# Altium PCB Pmaster-A9112-remote-1.PcbDoc
Units mil, origin at the board's own origin, x right, y up, seen from the top; angles counter-clockwise.
Board outline 1091.15 x 2078.81 mil, 2 copper layers (TopLayer, BottomLayer); 56 components, 56 nets, 182 pads, 223 vias.
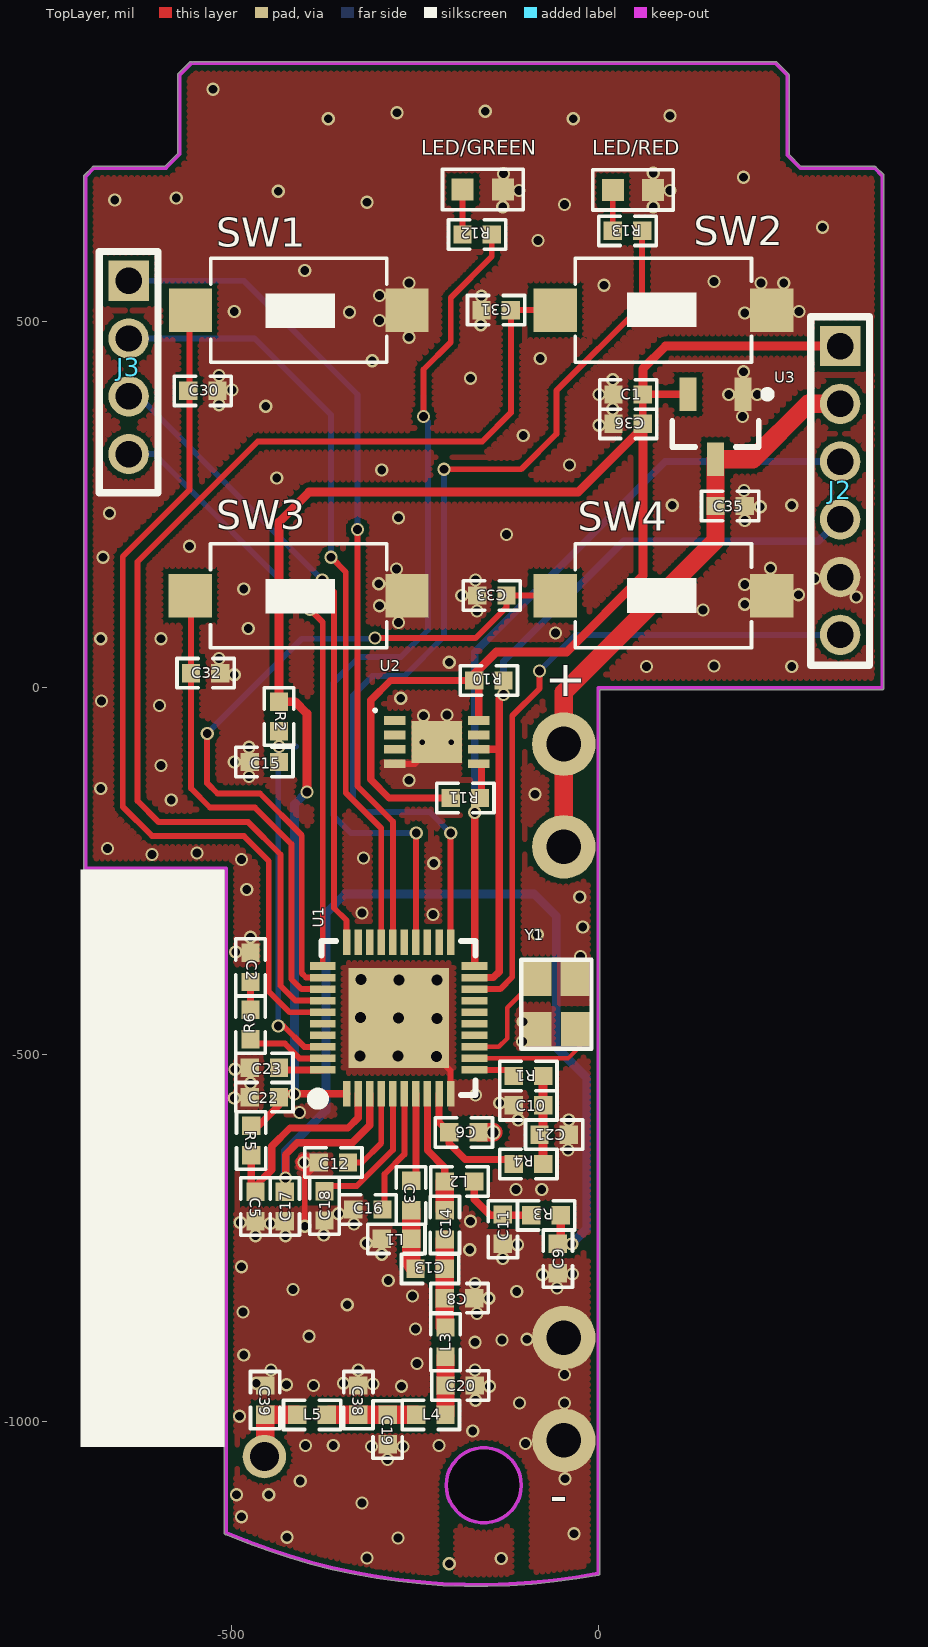
[diagram p0: TopLayer view]
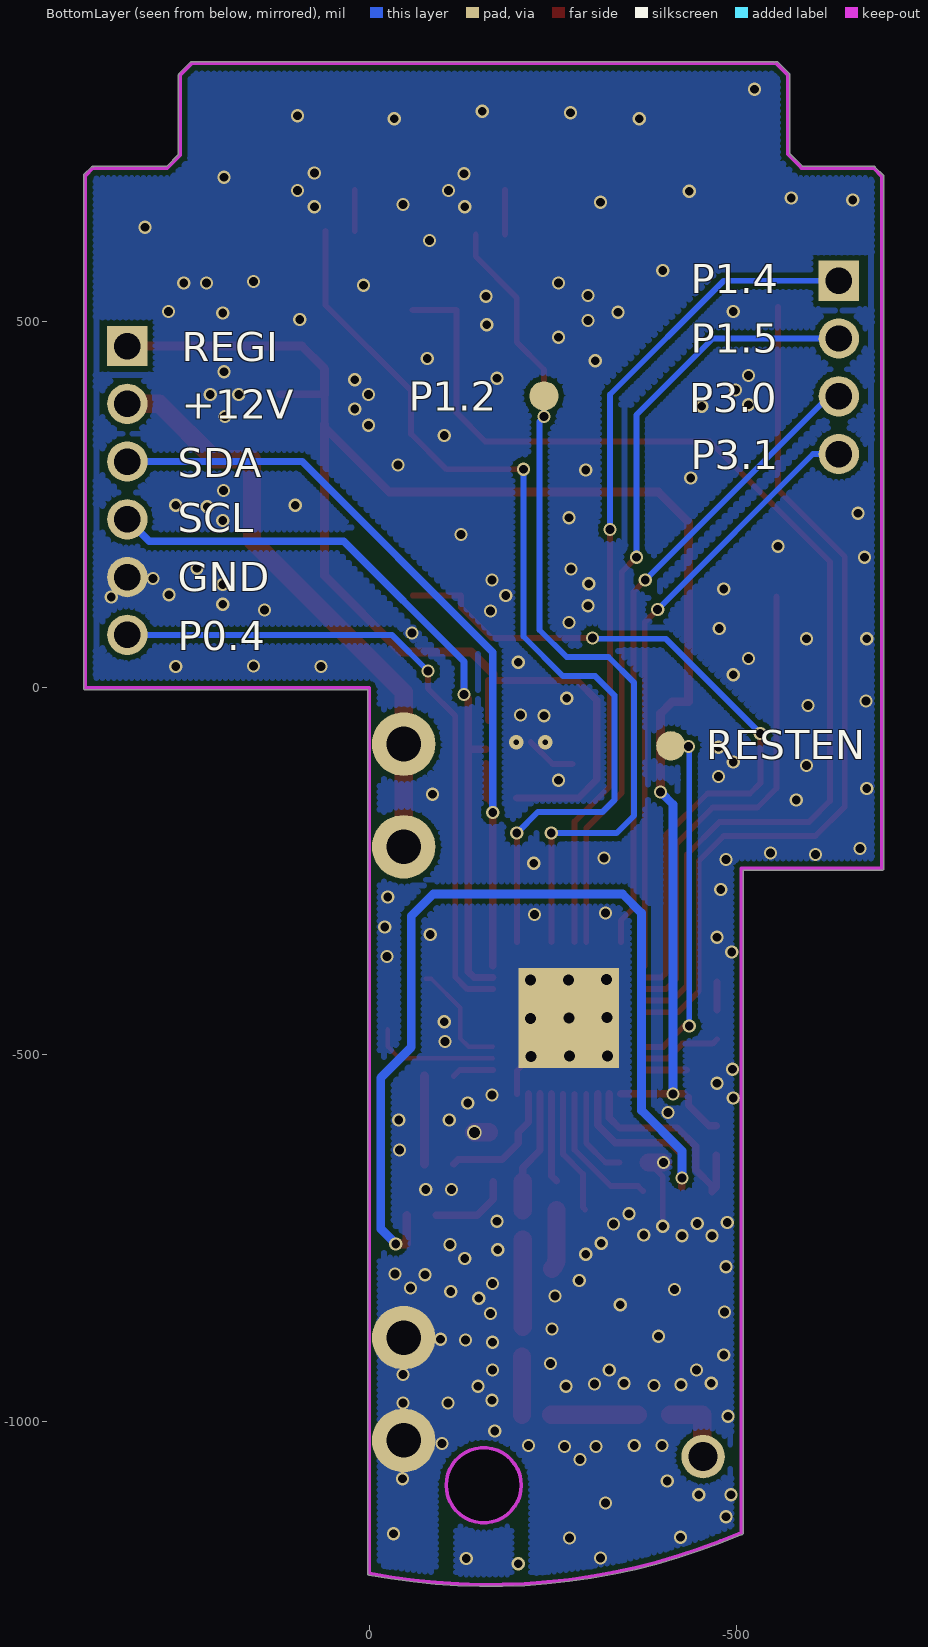
[diagram p1: BottomLayer view, seen from below]

## Layer stack, top to bottom
TopSolder: solder mask 0.4, Solder Resist, Dk 3.5
TopLayer: signal copper 1.4
Dielectric1: dielectric 12.6, FR-4, Dk 4.8
BottomLayer: signal copper 1.4
BottomSolder: solder mask 0.4, Solder Resist, Dk 3.5

## Board outline
-699,-248.51 cw(c-699,-246) -701.41,-245.29 -701.41,697.2 cw(c-698.9,697.2) -700.68,698.98 -689.46,710.2 cw(c-687.68,708.43) -687.68,710.94 -590.68,710.94 cw(c-588.62,709.49) -590.4,711.27 -573.11,728.56 -573.11,835.59 cw(c-570.59,835.59) -572.37,837.37 -556.62,853.12 cw(c-554.84,851.34) -552.6,852.47 cw(c-550.35,851.34) -550.35,853.85 241.97,853.85 cw(c241.97,851.34) 243.75,853.12 259.49,837.37 cw(c257.72,835.59) 260.23,835.59 260.23,727.52 cw(c257.72,727.52) 260.23,727.42 276.71,710.94 374.72,710.94 cw(c374.72,708.43) 375.87,710.67 cw(c377.01,708.43) 378.79,710.2 388.9,700.09 cw(c387.13,698.31) 389.64,698.31 389.64,0 cw(c387.13,0) 387.13,-2.51 2.51,-2.51 2.51,-1207.01 cw(c0,-1207.01) 0.45,-1209.48 cw(c-163.29,-356.2) -506.39,-1154.44 cw(c-507,-1152) -509.52,-1152 -509.52,-248.51
cut-out: -155.89,-1138.15 cw(c-155.89,-1086.97) -207.07,-1086.97 cw(c-155.89,-1086.97) -155.89,-1035.79 cw(c-155.89,-1086.97) -104.7,-1086.97 cw(c-155.89,-1086.97)

## Design rules (kind name [scope] priority, off if disabled: settings)
Clearance Clearance_1 [InNet('NetC19_1') vs (IsWire) Or (IsPad) Or (IsVia) Or (IsFill) Or (InPoly)] p1: gap=12
Clearance [All] p2: gap=7
ComponentClearance [All] p1 off: gap=10 collisioncheckmode=3 verticalgap=10 showdistances=FALSE
FabricationTestPointUsage TestPointUsage [All] p1: valid=0 allowmultiple=FALSE
FabricationTestpoint Testpoint [All] p1: side=3 testpointundercomponent=TRUE minsize=40 maxsize=100 preferedsize=60 minholesize=20 maxholesize=40 preferedholesize=32 testpointgrid=1 allowsidetop=TRUE allowsidebottom=TRUE usegrid=TRUE gridtolerance=0.01
PolygonConnect [All] p1: connectstyle=Direct reliefconductorwidth=10 reliefentries=4 polygonreliefangle="90 Angle" airgapwidth=10
RoutingPriority [All] p1: routingpriority=4
RoutingVias [All] p1: holewidth=16 width=26 viastyle="Through Hole" minholewidth=12 minwidth=18 maxholewidth=28 maxwidth=50
SolderMaskExpansion SolderMaskExpansion_1 [HasPad('*A')] p1: expansion=-30
SolderMaskExpansion [All] p2 off: expansion=0
SolderMaskExpansion SolderMaskExpansion_2 [All] p3 off: expansion=-30
Width [All] p1: maxlimit=100 minlimit=6 preferedwidth=8
26 further rules are at their usual default settings.

## Components (designator, comment, footprint, x,y, rotation, side; value= is the part's Value field where it differs from the comment)
C1 "10uF" A0402 61,400 r180 top
C2 "2.2uF" A0402 -474,-361 r270 top
C3 "100pF" A0402 -255,-672 r270 top
C5 "2.2uF" A0402 -467,-687 r270 top
C6 "1uF" A0402 -203,-606 r0 top
C8 "8.2pF" A0402 -169,-832 r180 top
C9 "2.2uF" A0402 -55,-758 r270 top
C10 "1nF" A0402 -115,-569 r0 top
C11 "NC" A0402 -130,-758 r90 top
C12 "1nF" A0402 -341,-647 r180 top
C13 "2.7pF" A0402 -249,-792 r0 top
C14 "27pF" A0402 -209,-712 r270 top
C15 "22nF" A0402 -435,-101 r180 top
C16 "0.1uF" A0402 -334,-711 r0 top
C17 "2.2uF" A0402 -427,-687 r270 top
C18 "470pF" A0402 -373,-726 r90 top
C19 "8.2pF" A0402 -287,-991 r270 top
C20 "15pF" A0402 -208,-951 r0 top
C21 "1uF" A0402 -40,-609 r180 top
C22 "2.2uF" A0402 -475,-558 r0 top
C23 "2.2uF" A0402 -475,-518 r0 top
C30 "0.1uF" A0402 -519,405 r180 top
C31 "0.1uF" A0402 -159,515 r0 top
C32 "0.1uF" A0402 -515,20 r180 top
C33 "0.1uF" A0402 -165,126 r0 top
C35 "2.2uF" A0402 200,248 r180 top
C36 "2.2uF" A0402 61,360 r180 top
C38 "NC" A0402 -327,-951 r270 top (schematic designator C19)
C39 "NC" A0402 -454,-951 r270 top (schematic designator C19)
J2 "Comment" HDR6_2.0#1 285,506 r270 top
J3 "Comment" HDR6_2.0#2 -685,595 r270 top
L1 "39nH" A0402 -255,-751 r180 top
L2 "33nH" A0402 -169,-673 r180 top
L3 "22nH" A0402 -208,-912 r90 top
L4 "22nH" A0402 -248,-991 r0 top
L5 "0" A0402 -410,-991 r0 top (schematic designator L4)
LED/GREEN "" 0603 -184.71,679.3 r0 top locked
LED/RED "" 0603 20,679 r0 top
R1 "0" A0402 -115,-529 r0 top
R2 "100K" A0402 -435,-19 r270 top
R3 "0" A0402 -51,-719 r180 top
R4 "0" A0402 -75,-649 r180 top
R5 "0" A0402 -473,-597 r270 top
R6 "50" A0402 -474,-479 r90 top
R10 "4.7k" A0402 -169,10 r0 top
R11 "4.7k" A0402 -161,-150 r180 top
R12 "330" A0402 -145,618 r180 top
R13 "330" A0402 60,623 r180 top
SW1 "SW-PB" SW-SMD -555.83,514.8 r90 top locked
SW2 "SW-PB" SW-SMD 236.73,514.8 r270 top locked
SW3 "SW-PB" SW-SMD -555.92,125.47 r90 top locked
SW4 "SW-PB" SW-SMD 236.73,125.47 r270 top locked
U1 "A9112F4" QFN40_5*5 -272,-450 r90 top
U2 "Comment" DFN-MC8 -220,-74 r0 top
U3 "LP3995-33B3F" SOT-23_N 160,356 r270 top
Y1 "Comment" XTAL_3.2*2.5 -57,-431 r0 top

## Footprints (in the part's own frame and the unit in brackets; to place one, negate y for a bottom-side part, rotate by r counter-clockwise, add the part's x,y. Pads: shape width x height; smd on the part's side, far side on the other; paste and mask are expansions set on the pad)
0603 [mil]
  rect 30x30 smd: 1(0,0) 2(55,0)
  silkscreen extent -28,-28 83,28
A0402 [mil]
  rect 25x25 smd: 1(0,0) 2(40,0)
  silkscreen extent -19,-20 59,20, body extent -5,-15 45,15, height 39
DFN-MC8 [mm] "SON, 8-Leads, Body 2x3mm, Pitch 0.5mm, Microchip Recommended"
  rect 1.75x1.45 smd: 0(0,0)
  rect 0.75x0.3 smd: 1(-1.45,0.75) 2(-1.45,0.25) 3(-1.45,-0.25) 4(-1.45,-0.75) 5(1.45,-0.75) 6(1.45,-0.25) 7(1.45,0.25) 8(1.45,0.75)
  silkscreen extent -2.18,1.05 -2.08,1.15, body extent -1.55,-1.05 1.55,1.05, height 1
HDR6_2.0#1 [mil]
  rect 55x55 hole 36: 1(40,45)
  round 55 hole 36: 2(118.74,45) 3(197.48,45) 4(276.22,45) 5(354.96,45) 6(433.7,45)
  silkscreen extent 0,5 475,85
HDR6_2.0#2 [mil]
  rect 55x55 hole 36: 1(40,45)
  round 55 hole 36: 2(118.74,45) 3(197.48,45) 4(276.22,45)
  silkscreen extent 0,5 329,85
QFN40_5*5 [mil]
  rect 35x10.24 smd: 1(-103.43,70.87) 2(-103.43,55.12) 3(-103.43,39.37) 4(-103.43,23.62) 5(-103.43,7.87) 6(-103.43,-7.87) 7(-103.43,-23.62) 8(-103.43,-39.37) 9(-103.43,-55.12) 10(-103.43,-70.87) 21(103.42,-70.87) 22(103.42,-55.12) 23(103.42,-39.37) 24(103.42,-23.62) 25(103.42,-7.87) 26(103.42,7.87) 27(103.42,23.62) 28(103.42,39.37) 29(103.42,55.12) 30(103.42,70.87)
  rect 10.24x35 smd: 11(-70.87,-103.42) 12(-55.12,-103.43) 13(-39.37,-103.43) 14(-23.62,-103.42) 15(-7.87,-103.42) 16(7.87,-103.42) 17(23.62,-103.43) 18(39.37,-103.42) 19(55.12,-103.43) 20(70.87,-103.42) 31(70.87,103.42) 32(55.12,103.43) 33(39.37,103.43) 34(23.62,103.42) 35(7.87,103.43) 36(-7.87,103.42) 37(-23.62,103.42) 38(-39.37,103.43) 39(-55.12,103.42) 40(-70.87,103.42)
  round 15 hole 15: ""(-52.5,-51.5) ""(-52,0.5) ""(-51.5,52.5) ""(-0.5,-52) ""(0.5,52) ""(51.5,-52.5) ""(52,-0.5) ""(52.5,51.5)
  rect 136.79x136.79 hole 15: ""(0,0)
  silkscreen extent -115,-105 105,115
SOT-23_N [mm] "SOT23, 3-Leads, Body 2.9x1.3mm, Pitch 0.95mm, Lead Span 2.5mm, IPC Medium Density"
  rect 1.15x0.6 smd: 1(-1.125,0.95) 2(-1.125,-0.95) 3(1.125,0)
  silkscreen extent -1.25,-1.5 0.7,1.92, body extent -0.7,-1.5 0.7,1.5, height 1.1
SW-SMD [mm]
  rect 1.5x1.5 smd: 1(0,0) 2(0,-7.5)
  silkscreen extent -1.8,-6.8 1.8,-0.7
XTAL_3.2*2.5 [mm]
  rect 1x1.2 smd: 1(-0.66,0.87) 2(-0.66,-0.87) 3(0.66,-0.87) 4(0.65,0.87)
  silkscreen extent -1.21,-1.55 1.22,1.53

## Part data
C1 C2 C3 C5 C6 C8 C10 C12 C13 C14 C16 C18 C21 C22 C23 C30 C31 C32 C33 C35 LED/GREEN LED/RED: library part CAP
C9 C11 C17 C19 C20 C36 C38 C39: library part C/0603, "Chip C"
C15: library part C/1206, "Chip C"
L1 L2: library part L/0402, "Chip L"
L3 L4 L5 R6: library part L/0603
R1 R5 R10 R11 R12 R13: library part RES1
R2: library part R/0402, "Chip R"
R3 R4: library part R/0603, "Chip  R"
U3: library part REG\G903\3.3V\SOT-223, "GMT 3.3V REGULTOR"

## Free pads (board coordinates)
  round 59.06 hole 39.37: 0(-455,-1048)
  round 40 smd far side: 1(-411,-79) 2(-238,398)
  round 86.61 hole 47.24: 1(-46.73,-216.57) 1(-46.73,-76.57) 2(-46.73,-1025.87) 2(-46.73,-885.87)

## Via types
v1: diameter 18, hole 12, TopLayer to BottomLayer, tented both sides, 220 vias
v2: diameter 19.68, hole 7.87, TopLayer to BottomLayer, tented top, 2 vias
v3: diameter 20, hole 15, TopLayer to BottomLayer, tented both sides, 1 vias

## Nets (pads, with @x,y where several pads share a name; then routed paths per layer and width w, separated by ;. In a path a pad name is that pad's centre, name@x,y a point inside that pad or via, vN(x,y) a via of type N, cw(c..) or ccw(c..) an arc to the next point about the centre after c; other vN are vias at no path point)
1: C39.2 L5.1 pad.0 | length 102
  TopLayer w25: pad.0 -454,-1048 C39.2 L5.1
+12V: C35.2 J2.2 pad.1@-46.73,-76.57 pad.1@-46.73,-216.57 U3.3 | length 815.2
  TopLayer w25: pad.1@-46.73,-216.57 -46.73,-76.57 -46.73,-5.73 160,201 U3.3 210.71,311.71 286.26,387.26 J2.2
BG: C12.1 U1.4 | length 123.5
  TopLayer w8: C12.1 -322,-647 -295.62,-620.62 U1.4
GND: C1.2 C2.1 C5.2 C6.2 C8.1 C9.2 C10.1 C11.1 C12.2 C15.2 C16.1 C17.2 C18.1 C19.2 C20.2 C21.1 C22.1 C23.1 C30.1 C31.1 C32.1 C33.1 C35.1 C36.2 C38.1 C39.1 J2.5 L1.2 LED/GREEN.2 LED/RED.2 pad.2@-46.73,-885.87 pad.2@-46.73,-1025.87 SW1.2 SW2.1 SW3.2 SW4.1 U1. U1.10 U2.0 U2.4 U3.1 Y1.2 Y1.4 | length 262.1
  TopLayer w8: v1(-400,-734) -400,-666 C12.2 ; U2.4 -249.53,-103.53 U2.0 ; U1.@-220.5,-502.5 -201.13,-521.87 U1.10
  TopLayer w25: v1@-400,-647 C12.2 ; C6.2 v3(-143,-606)
  other v1: -203,-1194 -132,-1187 -315,-1186 -273,-1159 -424,-1158 -33,-1153 -486,-1130 -322,-1111 -493,-1100 -449,-1100 -406,-1081 -45,-1078 -287,-1052 -309,-1034 -266,-1034 -399,-1033 -361,-1033 -217,-1033 -99,-1030 -171,-1013 -489,-993 -107,-975 -46,-975 -167,-971 -268,-952 -148,-952 -388,-951 -425,-950 -307,-949 -466,-948 -347,-948 -46,-936 -446,-930 -327,-930 -168,-930 -247,-921 -483,-909.57 -168,-892 -131,-889 -97,-888 -394,-884 -249,-874 -165,-853 -484,-851 -342,-841 -149,-832 -253,-829 -111,-823 -416,-820 -56,-818 -168,-812 -286,-808 -76,-800 -35,-799 -486,-789 -130,-778 -295,-772 -175,-766 -110,-759 -316,-757 -467,-747 -426,-747 -374,-746 -333,-731 -447,-730 -488,-729 -174,-727 -354,-717 -112,-684 -77,-684 -401,-647 -41,-630 -109,-589 -40,-589 -407,-579 -134,-566 -496,-559 -167,-555 -474,-539 -495,-520 -103,-482 -102,-455 -24,-366 -494,-360 -474,-340 -83,-336 -21,-326 -225,-309 -322,-307 -25,-285 -479,-275 -224,-239 -486,-234 -320,-232 -608,-227 -547,-225 -669,-219 -582,-153 -86,-145 -678,-137 -258,-126 -476,-121 -596,-106 -496,-101 -476,-81 -238,-38 -206,-37 -598,-24 -677,-18 -269,-14 -496,18 66,29 264,29 158,30 -203,35 -517,40 -678,67 -596,67 -58,75 -477,81 -272,89 -165,105 143,106 -298,112 200,114 352,124 -186,126 273,127 -483,135 200,141 -299,142 -167,147 295,149 -275,162 235,163 -675,178 -557,193 -125,209 200,228 -272,232 -666,238 221,247 101,249 264,249 199,269 -438,286 -295,297 -39,304 -102,344 1,358 197,370 20,380 -453,384 -517,386 1,400 178,400 217,400 -499,406 20,420 -174,422 -517,426 198,431 -308,446 -79,449 -258,478 -160,495 -298,501 95,502 200,511 -339,512 -496,513 274,513 -159,534 -298,535 8,549 -258,552 222,552 253,552 158,554 -400,569 -82,610 306,628 -130,656 75,656 -46,659 -315,662 -659,665 -575,668 -436,677 -108,678 98,678 198,696 -129,701 75,702 -368,776 -34,776 98,780 -274,784 -154,786 -525,816
  other v2: -239.68,-74 -200.32,-74
NetC2_2: C2.2 R6.2 | length 38
  TopLayer w10: R6.2 C2.2
NetC3_2: C3.2 C13.1 L1.1 | length 81.6
  TopLayer w25: C3.2 L1.1 -255,-777.52 ccw(c-234.52,-777.52) C13.1
NetC8_2: C8.2 C13.2 C14.2 L3.2 | length 119
  TopLayer w25: L3.2@-209,-871 C8.2 C14.2
NetC11_2: C11.2 L2.1 R3.2 | length 111.1
  TopLayer w10: L2.1 -169,-697 -147,-719 R3.2
NetC19_1: C19.1 C38.2 L4.1 L5.2 | length 118
  TopLayer w25: L5.2@-366,-991 C19.1 L4.1
NetC20_1: C20.1 L3.1 L4.2 | length 79
  TopLayer w25: L4.2 C20.1 L3.1
NetC23_2: C23.2 U1.40 | length 56.7
  TopLayer w10: C23.2@-432.13,-520.87 U1.40
NetLED_1_1: LED/GREEN.1 R12.2 | length 61
  TopLayer w8: R12.2 LED/GREEN.1@-185,679.01
NetLED_1_3: LED/RED.1 R13.2 | length 56
  TopLayer w8: R13.2 LED/RED.1
P0.0: U1.14
P0.1: U1.15
P0.2: U1.16
P0.3: U1.17
P0.4/DEBUG_EN: J2.6 U1.18 | length 921.2
  TopLayer w8: U1.18 -133.63,-410.63 -117,-394 -117,-38 -80,-1 v1(-80,23)
  BottomLayer w8: v1(-80,23) -30.7,72.3 J2.6
P0.5: 
P0.6: 
P0.7/GIO1: R13.1 U1.21 | length 1326.7
  TopLayer w8: v1(-210,298) -105,298 -57,346 -57,405 60,522 R13.1 ; U1.21 v1@-201.13,-198
  BottomLayer w8: v1(-210,298) -210,70 -264,16 -308,16 -334,-10 -334,-153 -318,-169 -230,-169 v1(-201,-198)
P1.0: U1.22
P1.1: U1.23
P1.2/GIO2: pad.2@-238,398 R12.1 U1.24 | length 1218.3
  TopLayer w8: U1.24 v1@-248.38,-198 ; v1(-238,370) -238,434 -201,471 -201,532 -145,588 R12.1
  BottomLayer w8: v1(-248,-198) -337,-198 -361,-174 -361,7 -326,42 -269,42 -232,79 -232,363 v1@-238,369 ; v1(-238,370) pad.2@-238,398
P1.3/CKO: U1.25
P1.4/TTDIO: J3.1 U1.26 | length 1142.7
  TopLayer w8: v1(-328,216) -328,-134 -279.87,-182.13 U1.26
  BottomLayer w8: J3.1 -483,555 -328,400 v1(-328,216)
P1.5/TTCLK: J3.2 U1.27 | length 1066.1
  TopLayer w8: v1(-364,178) -344,158 -344,-143 -295.62,-191.38 U1.27
  BottomLayer w8: J3.2 -468.26,476.26 -364,372 v1(-364,178)
P1.6: U1.28
P1.7: U1.29
P3.0: J3.3 U1.30 | length 875.1
  TopLayer w8: v1(-376,147) -360,131 -360,-300 -342.87,-317.13 U1.30
  BottomLayer w8: J3.3 -626.52,397.52 v1(-376,147)
P3.1: J3.4 U1.31 | length 828.1
  TopLayer w8: v1(-393,107) -375.42,89.42 U1.31
  BottomLayer w8: J3.4 -604.78,318.78 v1(-393,107)
P3.2: C33.2 SW4.2 U1.32 | length 1006.2
  TopLayer w8: v1(-533,-62) -533,-130 -519,-144 -461,-144 -404,-201 -404,-389 -398.12,-394.88 U1.32 ; v1(-304,68) -167,68 -125,110 C33.2 SW4.2@-59.07,126
  BottomLayer w8: v1(-533,-62) -404,67 v1@-304,67
P3.3: C32.2 SW3.1 U1.33 | length 662.3
  TopLayer w8: SW3.1@-555,124.55 C32.2 -555,-137 -529,-163 -468,-163 -418,-213 -418,-397 -404.37,-410.63 U1.33
P3.4: C31.2 SW2.2 U1.34 | length 1589.6
  TopLayer w8: U1.34 -412.62,-426.38 -433,-406 -433,-227 -477,-183 -599,-183 -628,-154 -628,172 -464,336 -158,336 -119,375 C31.2 SW2.2@-58.74,515
P3.5: C30.2 SW1.1 U1.35 | length 1211.6
  TopLayer w8: SW1.1@-557,519 -557,270 -648,179 -648,-162 -608,-202 -483,-202 -449,-236 -449,-414 -420.87,-442.13 U1.35
P3.6: 
P3.7: 
REGI: C1.1 C22.2 C36.1 J2.1 R2.1 R5.1 R10.1 R11.2 U1.1 U2.8 U3.2 | length 2865.3
  TopLayer w10: R5.1 -463,-597 -435,-569 C22.2 ; C22.2@-429.42,-553.43 v1(-414,-553.43) U1.1 ; R11.2 -285,-150 -310,-125 -310,-17 -283,10 R10.1 ; U2.8 R10.1@-162.91,10 ; C36.1 C1.1 ; C1.1@61.29,400.29 U3.2
  TopLayer w12: v1(-397,-142) -397,-35 -413,-19 R2.1 -435,226 -394,267 -27,267 C36.1@61,355 ; R10.1 -169,19 -139,49 -43,49 61,153 C36.1@61,355 ; C36.1 C36.1@61,355 ; C1.1 61,435 92,466 J2.1
  BottomLayer w12: v1(-414,-553.43) -414,-159 v1(-397,-142)
RESETN: C15.1 pad.1@-411,-79 R2.2 U1.38 | length 475.3
  TopLayer w8: v1(-436,-461) -429,-461 -400.63,-489.37 U1.38
  BottomLayer w8: v1(-436,-461) v1@-436,-81 ; v1(-435,-80) pad.1@-412,-80
RFI: C3.1 U1.7 | length 121.3
  TopLayer w10: C3.1 -248.38,-665.38 U1.7
RFO: C14.1 L2.2 U1.8 | length 168.4
  TopLayer w10: U1.8 -232.63,-630.37 -209,-654 L2.2
  TopLayer w25: C14.1 L2.2
RSSI: C18.2 U1.5 | length 192.8
  TopLayer w8: C18.2 -366,-679 -329,-679 -279.87,-629.87 U1.5
RTCI: U1.36
RTCO: U1.37
SCL: J2.4 R10.2 U1.19 U2.6 | length 1044.5
  TopLayer w10: U1.19 -142.88,-394.88 -135,-387 -135,-15 v1(-129,-9) R10.2 ; U2.6@-158.91,-83.84 -135,-83.84
  BottomLayer w10: v1(-129,-9) -129,36 35,200 300.22,200 J2.4
SDA: J2.3 R11.1 U1.20 U2.5 | length 1103.6
  TopLayer w10: U1.20 U1.20@-168.21,-378.76 ; U1.20@-168.58,-378.76 U1.20@-168.21,-378.76 ; R11.1 -168.21,-157.21 v1(-168.21,-170) U1.20@-168.21,-378.76 ; R11.1@-158.91,-149.91 U2.5@-158.91,-103.53
  BottomLayer w10: v1(-168.21,-170) -168.21,48.79 91.52,308.52 J2.3
VCO_GND: 
VDD_A: C16.2 U1.6 | length 169.9
  TopLayer w8: C16.2 -291,-708 -291,-662.8 -264.13,-635.93 U1.6
VDD_D: R6.1 U1.39 | length 109.4
  TopLayer w8: R6.1 -468,-485 -427,-485 -406.88,-505.12 U1.39
VDD_P: R1.1 U1.11 | length 56.9
  TopLayer w8: U1.11 -123.13,-520.87 R1.1
VDD_V: C6.1 R4.2 U1.9 | length 172.9
  TopLayer w10: U1.9 -216.88,-592.12 C6.1 -203,-621 -181,-643 -121,-643 R4.2
VDDP: C10.2 C21.2 R1.2 R4.1 | length 120
  TopLayer w12: R4.1 R1.2
VPAI: C5.1 R5.2 U1.2 | length 290.3
  TopLayer w10: R5.2 -473,-681 C5.1 -467,-679 -445,-657 -445,-625 -420,-600 -341,-600 -327.12,-586.12 U1.2
VPAO: C9.1 C17.1 R3.1 U1.3 | length 1466.6
  TopLayer w10: C17.1@-426,-681 v1(-426,-668) -426,-636 -410,-620 -335,-620 -311.37,-596.37 U1.3
  TopLayer w12: R3.1 -51,-758 v1(-36,-758)
  BottomLayer w12: v1(-426,-668) -426,-631 -371,-576 -371,-307 -345,-281 -87,-281 -57,-311 -57,-490 -15.5,-531.5 -15.5,-737.5 v1(-36,-758)
XI: U1.13 Y1.1 | length 154.6
  TopLayer w6: U1.13 -135.37,-489.37 -124,-478 -124,-436 -84.75,-396.75 Y1.1@-76.98,-396.75
XO: U1.12 Y1.3 | length 174
  TopLayer w6: U1.12 -41.12,-505.12 -25.02,-489.02 Y1.3@-25.02,-465.25
pads on no net: U2.1 U2.2 U2.3 U2.7

## Polygon pours and split planes (outlines as drawn)
GND on TopLayer "TopLayer-No Net" (hatched 90Degree grid 8 track 8, remove dead copper, pour order 4): -733,889 408,889 402,889 402,-1346 402,-1378 -733,-1378
GND on BottomLayer "TopLayer-No Net" (hatched 90Degree grid 8 track 8, remove dead copper, pour order 3): -733,889 408,889 402,889 402,-1346 402,-1378 -733,-1378

## Keep-outs
KeepOutLayer:
  circle w5: c793.11,-3.97 r51.18
  circle w5: c-155.89,-1086.97 r51.18
  lines w5: -699,-246 -507,-246 -507,-1152 ; -698.9,-246 -698.9,697.2 -687.68,708.43 -588.62,708.43 ; -588.62,709.49 -570.59,727.52 -570.59,835.59 -554.84,851.34 -550.35,851.34 241.97,851.34 257.72,835.59 257.72,727.52 257.72,726.38 275.67,708.43 374.72,708.43 377.01,708.43 387.13,698.31 387.13,0 0,0 0,-1207.01 cw(c-163.29,-356.2) -506.79,-1151.52
  text "零件禁置區" at 1006,288 h157.48
  text "定位孔" at 1000,-35 h157.48

## Other copper
TopLayer:
  pour cut-out: -191,-580 -144,-580 cw(c-144,-606) -118,-606 cw(c-142,-606) -142,-630 -191,-630

## Silkscreen, mask and mechanical layers (free items; w line width, h text height)
TopOverlay:
  region: -509.15,-1035 -509.15,-247.6 -706,-247.6 -706,-1035
  text "+" at -73,31 h50 r180
  text "-" at -66,-1088 h50 r180
BottomOverlay:
  text "P1.4" at -438,538 h40
  text "P1.5" at -438,457 h40
  text "REGI" at 256,445 h40
  text "P1.2" at -54,378 h40
  text "P3.0" at -436,376 h40
  text "+12V" at 256,367 h40
  text "P3.1" at -438,298 h40
  text "SDA" at 261,287 h40
  text "SCL" at 261,212 h40
  text "GND" at 261,132 h40
  text "P0.4" at 261,51 h40
  text "RESTEN" at -459,-97 h40
BottomSolder:
  rectangle: -503,-1146 -347,-1097
  rectangle: -405,-1146 -347,-939
  rectangle: -503,-996 -347,-939
Mechanical1:
  circle w5: c797.43,332.03 r118.11
  circle w5: c-159.57,352.03 r118.11
  lines w5: -260.55,290.39 -260.55,412.44 ; -240.87,266.77 -240.87,436.06 ; -221.18,251.02 -221.18,451.81 ; -207,-1088 -104.64,-1088 ; -202,-1108 -111.45,-1108 ; -201.5,243.15 -201.5,459.69 ; -201,-1069 -110.45,-1069 ; -188,-1125 -125.01,-1125 ; -187,-1049 -124.01,-1049 ; -181.81,239.21 -181.81,463.62 ; -162.13,235.28 -162.13,467.56 ; -142.44,235.28 -142.44,467.56 ; -122.76,241.18 -122.76,463.62 ; -103.07,251.02 -103.07,455.75 ; -83.39,262.83 -83.39,440 ; -63.7,282.52 -63.7,420.31 ; 696.45,270.39 696.45,392.44 ; 716.13,246.77 716.13,416.06 ; 735.82,231.02 735.82,431.81 ; 741.93,-3.97 844.3,-3.97 ; 747.46,-23.65 838.02,-23.65 ; 748.21,15.72 838.76,15.72 ; 755.5,223.15 755.5,439.69 ; 761.24,-43.34 824.24,-43.34 ; 761.99,35.4 824.98,35.4 ; 775.19,219.21 775.19,443.62 ; 794.87,215.28 794.87,447.56 ; 814.56,215.28 814.56,447.56 ; 834.24,221.18 834.24,443.62 ; 853.93,231.02 853.93,435.75 ; 873.61,242.83 873.61,420 ; 893.3,262.52 893.3,400.31

## Dimensions
-207.07,-1086.97 to -104.7,-1086.97 on KeepOutLayer
0,0 to 387.13,0 on Mechanical1
-698.9,697.2 to 387.13,0 on Mechanical1
-277.68,352.03 to -41.46,352.03 on Mechanical1